# Altium PCB AOP6432.PcbDoc (part 3 of 3)
Units mm, origin at the board's own origin, x right, y up, seen from the top; angles counter-clockwise.
Board outline 64.05 x 39.02 mm, 4 copper layers (Top Layer, Layer 1, Layer 2, Bottom Layer), stack 1.52 mm thick; 112 components, 77 nets, 423 pads, 19 vias.
Unrouted connection lines stored in the file: 2.
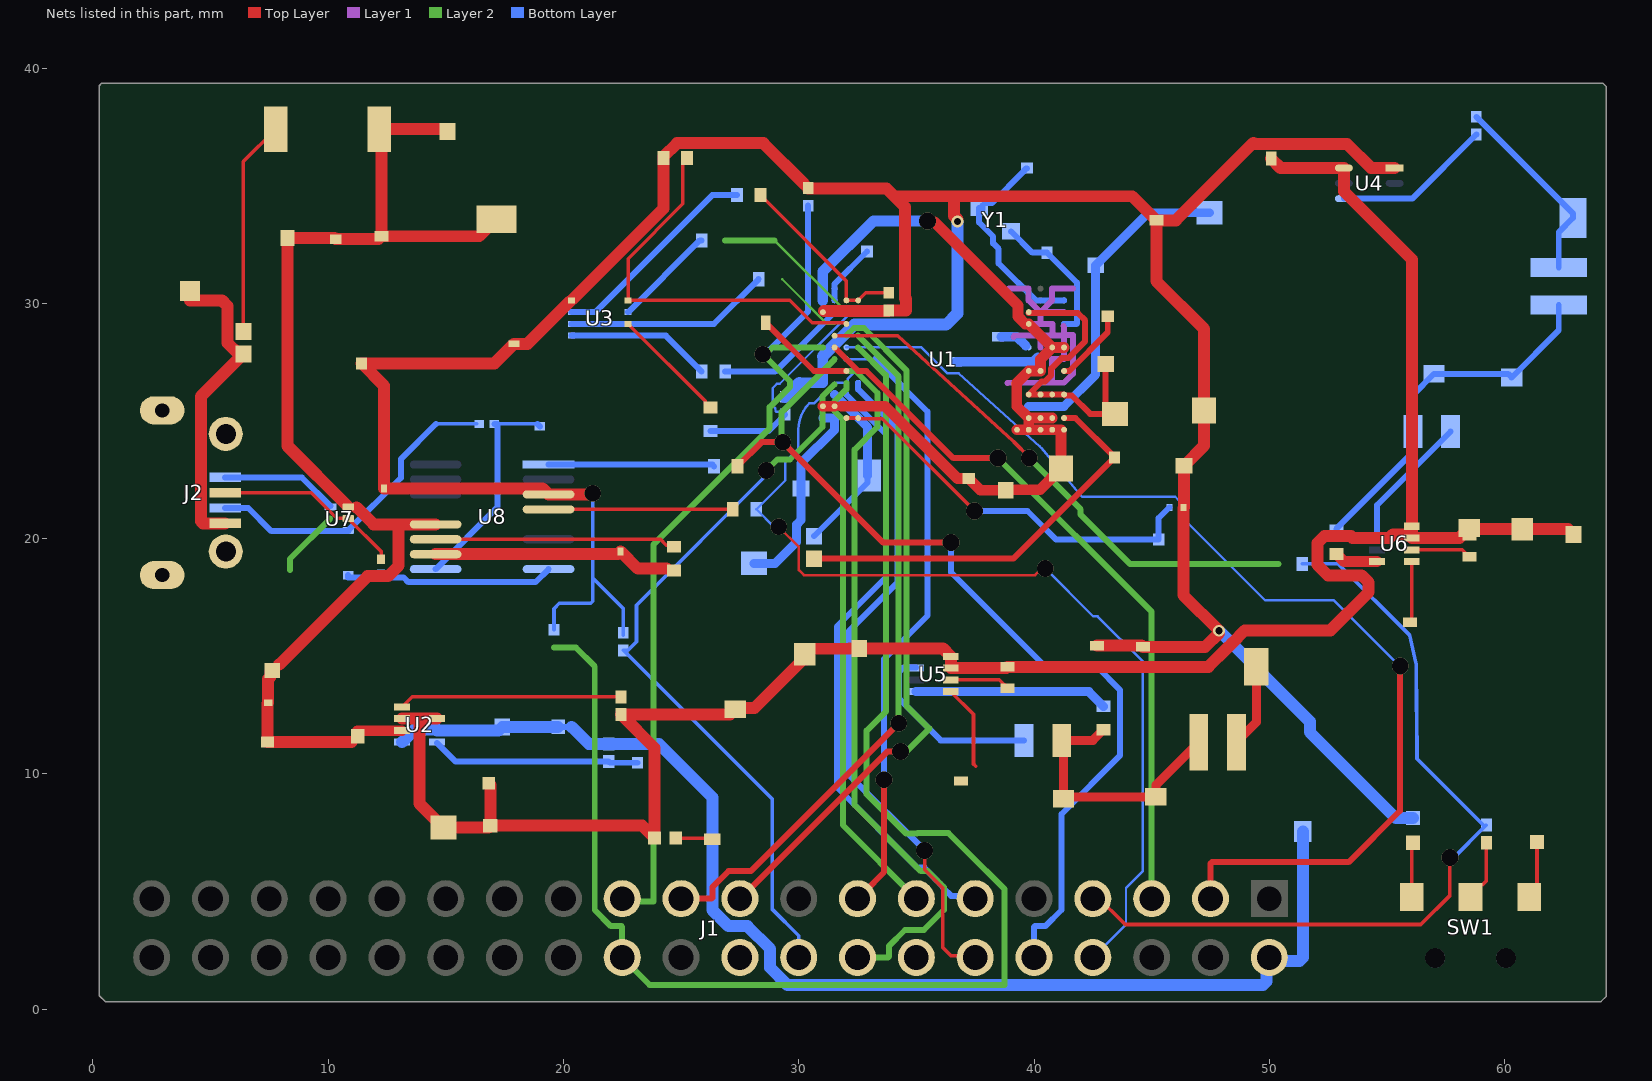
[diagram p4: the nets of this part, all layers, seen from the top]

## Via types
v1: diameter 0.711, hole 0.711, Top Layer to Bottom Layer, 17 vias
v2: diameter 0.5, hole 0.3, Top Layer to Bottom Layer, 2 vias

## Nets (pads, with @x,y where several pads share a name; then routed paths per layer and width w, separated by ;. In a path a pad name is that pad's centre, name@x,y a point inside that pad or via, vN(x,y) a via of type N, cw(c..) or ccw(c..) an arc to the next point about the centre after c; other vN are vias at no path point) (continued)
pads on no net: J1.1 J1.4 J1.6 J1.9 J1.17 J1.22 J1.25 J1.26 J1.27 J1.28 J1.29 J1.30 J1.31 J1.32 J1.33 J1.34 J1.35 J1.36 J1.37 J1.38 J1.39 J1.40 SW1. U1.A8 U1.B8 U1.L3 U1.L4 U4.2 U4.5 U5.6 U6.6 U8.2 U8.6 U8.7 U8.14 U8.15 U8.16

## Polygon pours and split planes (outlines as drawn)
GND on Layer 1 "GND_L02_P000" (solid, pour order 0): -0.975,40.638 -0.725,40.388 64.525,40.388 64.525,-0.487 64.4,-0.612 64.2,-0.412 -0.475,-0.412 -0.475,40.263 -0.975,40.763

## Silkscreen, mask and mechanical layers (free items; w line width, h text height)
Mechanical 1:
  lines w0.254: 0.275,39.25 0.375,39.35 ; 0.275,39.25 0.375,39.35 ; 0.275,39.25 0.275,0.575 0.525,0.325 64.1,0.325 64.325,0.55 64.325,39.2 64.175,39.35 0.375,39.35

## Text inside footprints (layer, text, board x,y; h text height)
J2: Mechanical 12 "PTH Slot 1.3 +/- 0.05 X 0.6 +/- 0.05" at 9.65,24.55 h0.5 r270; Mechanical 12 "PTH 0.85 +/- 0.05" at 10.415,17.505 h0.5 r270; Bottom 3D Body "PCB Edge" at 1.7,26.45 h1 r270